# EAGLE board sensor_vol_div_eagle2 (EAGLE 7.5.0)
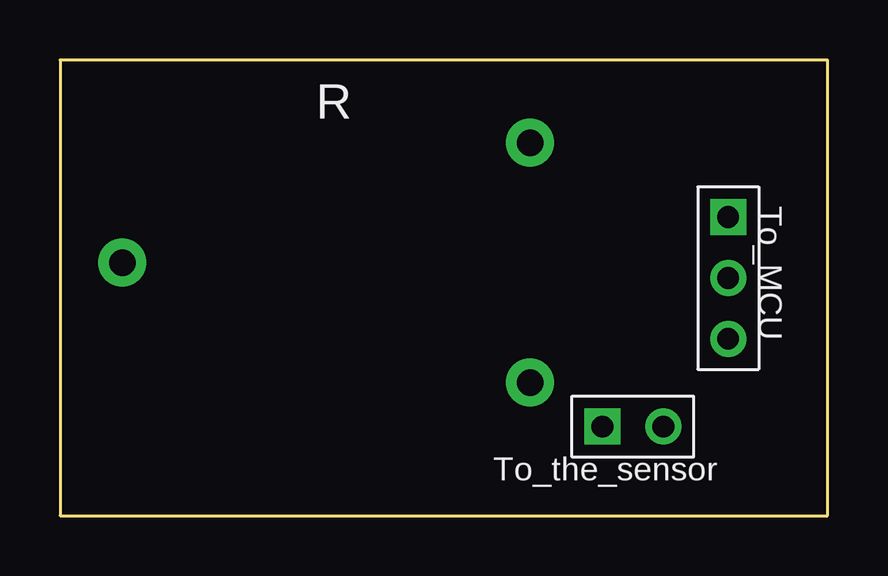
[diagram p0: board, top side]
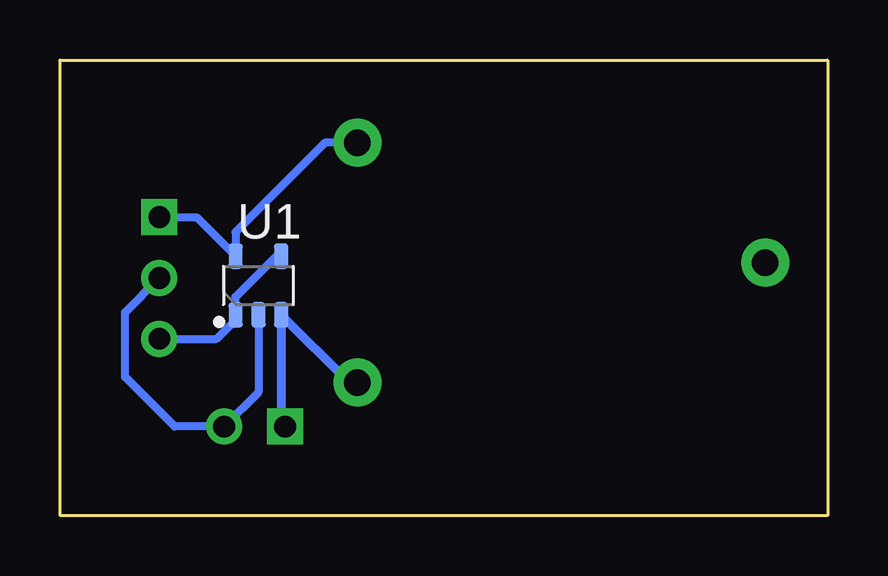
[diagram p1: board, bottom side, seen from below]

Size 32 x 19 mm. Coordinates in mm from the lower left corner, seen from the top.
Outline: 0,19 0,0 32,0 32,19 0,19
Copper layers (1*16): Top 0.035mm / dielectric 1.5mm / Bottom 0.035mm
Design rules "default *": minimum track width 10mil, minimum drill 0.61mm, track to track 8mil, track to pad 8mil, pad to pad 8mil, via to via 8mil, smd to smd 8mil, copper to edge 40mil, drill to drill 8mil, minimum pad ring 0mil, minimum via ring 8mil, stop-mask expansion 2mil, vias tented up to drill 19mil, thermal gap 10mil
Net classes: 0 Default: width 0.33 mm, clearance 0.33 mm

## Footprints (pad centres in the part's own frame; a part is rotated, then mirrored left to right if it is on the bottom)
P3 = drill 1.1 pad 2: 1 8.5,5; 2 -8.5,0; 3 8.5,-5
HDR-1x3 = drill 0.9 pad 1.5 square: 1 -2.54,0 | drill 0.9 pad 1.5: 2 0,0; 3 2.54,0
HDR-1x2 = drill 0.9 pad 1.5 square: 1 -1.27,0 | drill 0.9 pad 1.5: 2 1.27,0
SOT23-5P95_280X100L45X40N = smd 0.61 x 1.07: 1 -0.95,-1.225; 2 0,-1.225; 3 0.95,-1.225; 4 0.95,1.225; 5 -0.95,1.225

## Placement (x,y rotation side)
R  DEV_R  [P3]  11.1,10.54 0 top
To_MCU  HDR-1X3  [HDR-1x3]  27.86,9.91 270 top
To_the_sensor  HDR-1X2  [HDR-1x2]  23.89,3.72 0 top
U1  AD8615AUJZ-REEL  [SOT23-5P95_280X100L45X40N]  23.73,9.59 0 bottom

## Library data of the parts
R = common
To_MCU = common; UNIQUE_NAME: HDR-1x3
To_the_sensor = common; UNIQUE_NAME: HDR-1x2
U1 = common; DATASHEET: http://datasheets.diptrace.com/analog_devices/AD8615_8616_8618.pdf; MANUFACTURER: Analog Devices; PART_NUMBER_(DIGI-KEY): AD8615AUJZ-REELDKR-ND; UNIQUE_NAME: ANALOG_UJ-5

## Nets
Net_0: To_MCU.3 U1.1 U1.4
Net_1: R.3 To_the_sensor.1 U1.3
Net_2: R.1 To_MCU.1 U1.5
Net_3: To_MCU.2 To_the_sensor.2 U1.2

## Tracks (layer width: path | path; a pad name or v marks a point on that pad's centre or on a via)
Net_0
  Bottom 0.33: To_MCU.3 25.47,7.37 24.68,8.16 U1.1 24.68,9.12 22.98,10.82 U1.4
Net_1
  Bottom 0.381: R.3 19.96,5.54 U1.3 22.78,3.88 To_the_sensor.1
Net_2
  Bottom 0.33: To_MCU.1 26.31,12.45 U1.5 24.68,11.82 20.95,15.54 R.1
Net_3
  Bottom 0.33: To_MCU.2 29.28,8.48 29.28,5.78 27.22,3.72 To_the_sensor.2 23.73,5.14 U1.2

## Text on the board
tPlace: R | To_MCU | To_the_sensor
bPlace: U1